# Altium PCB keyboardModule.PcbDoc
Units mil, origin at the board's own origin, x right, y up, seen from the top; angles counter-clockwise.
Board outline 800 x 4750 mil, 2 copper layers (Top Layer, Bottom Layer); 49 components, 46 nets, 169 pads, 26 vias.
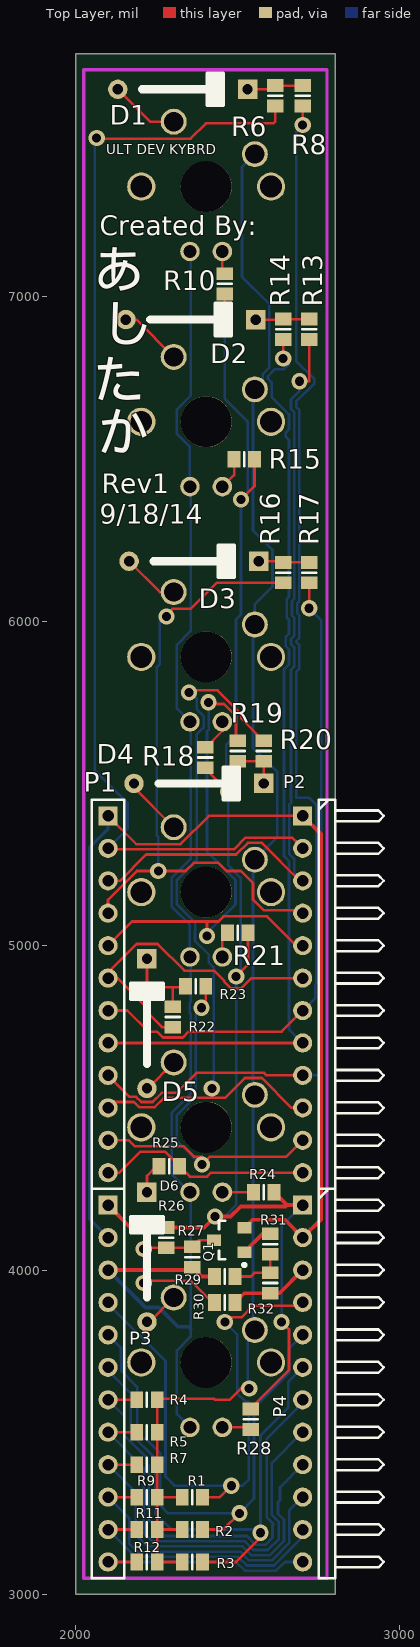
[diagram p0: Top Layer view]
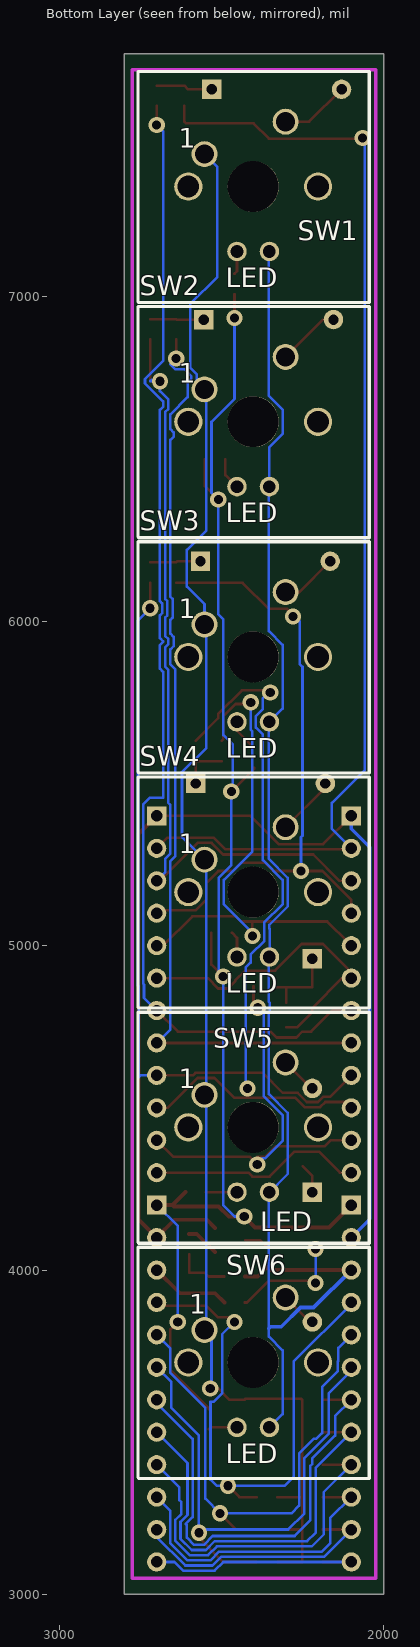
[diagram p1: Bottom Layer view, seen from below]

## Layer stack, top to bottom
Top Layer: signal copper 1.4
Dielectric: dielectric 12.6, FR-4, Dk 4.8
Bottom Layer: signal copper 1.4

## Board outline
2000,3000 2800,3000 2800,7750 2000,7750

## Design rules (kind name [scope] priority, off if disabled: settings)
Clearance [All] p1: gap=8
PolygonConnect [All] p1: connectstyle=Relief reliefconductorwidth=10 reliefentries=4 polygonreliefangle="90 Angle"
RoomDefinition VerticalKeyStrip [InComponentClass('VerticalKeyStrip')] p1: selectionmemoryflags=160 confinementstyle=ConfineIn formatcopy=TRUE lockcomponents=FALSE outline 2800,3000 2000,3000 2000,7750 2800,7750
RoutingVias [All] p1: holewidth=25 width=40 viastyle="Through Hole" minholewidth=28 minwidth=50 maxholewidth=28 maxwidth=50
SilkscreenOverComponentPads [All] p1: minsilkscreentomaskgap=10
SolderMaskExpansion [All] p1: expansion=4
Width [All] p1: maxlimit=25 minlimit=8 preferedwidth=8
27 further rules are at their usual default settings.

## Components (designator, comment, footprint, x,y, rotation, side; value= is the part's Value field where it differs from the comment)
D1 "1N4148" DIODE400/60/32 2530,7640 r180 top
D2 "1N4148" DIODE400/60/32 2555,6930 r180 top
D3 "1N4148" DIODE400/60/32 2565,6185 r180 top
D4 "1N4148" DIODE400/60/32 2580,5500 r180 top
D5 "1N4148" DIODE400/60/32 2220,4960 r270 top
D6 "1N4148" DIODE400/60/32 2220,4240 r270 top
P1 "Header 12H" HDR1X12 2100,5400 r270 top
P2 "Header 12H" HDR1X12H_Right 2700,5400 r270 top
P3 "Header 12H" HDR1X12 2100,4200 r270 top
P4 "Header 12H" HDR1X12H_Right 2700,4200 r270 top
Q1 "NPN_TRANSISTOR" SOT23-3 2520,4055 r180 top
R1 "Res Semi" RESC2012L 2360,3300 r180 top
R2 "Res Semi" RESC2012L 2360,3200 r180 top
R3 "Res Semi" RESC2012L 2360,3100 r180 top
R4 "Res Semi" RESC2012L 2220,3600 r0 top
R5 "Res Semi" RESC2012L 2220,3500 r0 top
R6 "Res Semi" RESC2012L 2615,7620 r270 top
R7 "Res Semi" RESC2012L 2220,3400 r0 top
R8 "Res Semi" RESC2012L 2700,7620 r270 top
R9 "Res Semi" RESC2012L 2220,3300 r0 top
R10 "Res Semi" RESC2012L 2460,7040 r90 top
R11 "Res Semi" RESC2012L 2220,3200 r0 top
R12 "Res Semi" RESC2012L 2220,3100 r0 top
R13 "Res Semi" RESC2012L 2720,6900 r270 top
R14 "Res Semi" RESC2012L 2640,6900 r270 top
R15 "Res Semi" RESC2012L 2520,6500 r180 top
R16 "Res Semi" RESC2012L 2640,6150 r270 top
R17 "Res Semi" RESC2012L 2720,6150 r270 top
R18 "Res Semi" RESC2012L 2400,5580 r90 top
R19 "Res Semi" RESC2012L 2500,5600 r90 top
R20 "Res Semi" RESC2012L 2580,5600 r90 top
R21 "Res Semi" RESC2012L 2500,5040 r180 top
R22 "Res Semi" RESC2012L 2300,4780 r270 top
R23 "Res Semi" RESC2012L 2370,4875 r0 top
R24 "Res Semi" RESC2012L 2580,4240 r180 top
R25 "Res Semi" RESC2012L 2288.5,4320 r0 top
R26 "Res Semi" RESC2012L 2280,4100 r90 top
R27 "Res Semi" RESC2012L 2360,4040 r270 top
R28 "Res Semi" RESC2012L 2540,3540 r270 top
R29 "Res Semi" RESC2012L 2460,3980 r0 top
R30 "Res Semi" RESC2012L 2460,3900 r0 top
R31 "Res Semi" RESC2012L 2600,4080 r90 top
R32 "Res Semi" RESC2012L 2600,3960 r90 top
SW1 "CherrySwitch" CherryMxSwitch 2552.5,7440 r180 bottom
SW2 "CherrySwitch" CherryMxSwitch 2552.5,6715 r180 bottom
SW3 "CherrySwitch" CherryMxSwitch 2552.5,5990 r180 bottom
SW4 "CherrySwitch" CherryMxSwitch 2552.5,5265 r180 bottom
SW5 "CherrySwitch" CherryMxSwitch 2552.5,4540 r180 bottom
SW6 "CherrySwitch" CherryMxSwitch 2552.5,3815 r180 bottom

## Footprints (in the part's own frame and the unit in brackets; to place one, negate y for a bottom-side part, rotate by r counter-clockwise, add the part's x,y. Pads: shape width x height; smd on the part's side, far side on the other; paste and mask are expansions set on the pad)
CherryMxSwitch [mil] "Cherry Mx Switch with holes for LED"
  round 80 hole 59: 1(0,0) 2(250,100)
  round 60 hole 39: 3(100,-300) 4(200,-300)
  round 87 hole 67: 5(-50,-100) 7(350,-100)
  round 157 hole 157 unplated: 6(150,-100)
  silkscreen extent -205,-458 508,255
DIODE400/60/32 [mil]
  rect 60x60 hole 32: 1(0,0)
  round 60 hole 32: 2(400,0)
  silkscreen extent 75,-50 325,50
HDR1X12 [mm] "Connector; Header; 12 Position"
  rect 1.5x1.5 hole 0.9: 1(0,0)
  round 1.5 hole 0.9: 2(2.54,0) 3(5.08,0) 4(7.62,0) 5(10.16,0) 6(12.7,0) 7(15.24,0) 8(17.78,0) 9(20.32,0) 10(22.86,0) 11(25.4,0) 12(27.94,0)
  silkscreen extent -1.27,-1.27 29.21,1.27
HDR1X12H_Right [mm] "Connector; Header; 12 Position; Right Angle"
  rect 1.5x1.5 hole 0.9: 1(0,0)
  round 1.5 hole 0.9: 2(2.54,0) 3(5.08,0) 4(7.62,0) 5(10.16,0) 6(12.7,0) 7(15.24,0) 8(17.78,0) 9(20.32,0) 10(22.86,0) 11(25.4,0) 12(27.94,0)
  silkscreen extent -1.27,1.27 29.21,6.35
RESC2012L [mm] "Chip Resistor, Body 2.0x1.3mm, IPC High Density"
  rect 1x1.3 smd: 1(-0.8,0) 2(0.8,0)
  silkscreen extent 0,-0.55 0,0.55, body extent -1.07,-0.7 1.07,0.7, height 2.54
SOT23-3 [mm] "SOT23, 3-Leads, Body 3.0x2.8mm (max), Pitch 0.95mm, IPC Medium Density"
  rect 1.1x0.9 smd: 1(0,0) 2(0,-1.9) 3(2.36,-0.95)
  silkscreen extent -0.13,-2.45 1.98,1.12, body extent 0.38,-2.47 1.98,0.57, height 1.4

## Part data
D1 D2 D3 D4 D5 D6: library part 5283, "Diode, 1N4148, 75V, 0.4 in., DO-35, 150mA, Switching, 500mW, Any"
P1 P2 P3 P4: "Header, 12-Pin, Right Angle"
Q1: library part 265442, "Transistor, MMBT4401, 40V, SOT23-3, 500mA, NPN, Transistor, On Semi: MMBT4401LT1"
R1 R2 R3 R4 R5 R6 R7 R8 R9 R10 R11 R12 R13 R14 R15 R16 R17 R18 R19 R20 R21 R22 R23 R24 R25 R26 R27 R28 R29 R30 R31 R32: "Semiconductor Resistor"
SW1 SW2 SW3 SW4 SW5 SW6: "Cherry MX Switch layout"

## Via types
v1: diameter 50, hole 28, Top Layer to Bottom Layer, 26 vias

## Nets (pads, with @x,y where several pads share a name; then routed paths per layer and width w, separated by ;. In a path a pad name is that pad's centre, name@x,y a point inside that pad or via, vN(x,y) a via of type N, cw(c..) or ccw(c..) an arc to the next point about the centre after c; other vN are vias at no path point)
+5: P3.1 P4.1 R10.1 R15.1 R18.1 R21.1 R24.1 R26.2 R28.1 | length 4773.7
  Top Layer w8: R18.1 2400,5545 v1(2470,5475) ; v1(2460,6935) R10.1 ; v1(2495,4905) 2531.5,4941.5 R21.1 ; v1(2510,6375) 2551.5,6416.5 R15.1 ; R28.1 2540,3574.01 2658,3692.01 2658,3817 v1(2635,3840)
  Top Layer w12: P3.1 2168.5,4131.5 R26.2 2396.5,4131.5 v1(2430,4165) 2478,4165 2509,4196 2647.5,4196 2651.5,4200 ; R24.1 2651.5,4200 ; P4.1 2651.5,4200
  Bottom Layer w8: v1(2430,4165) 2460,4165 2495,4200 v1(2495,4905) 2509,4919 2509,5209.11 2470,5248.11 v1(2470,5475) ; v1(2460,6935) 2460,6685.49 2531,6614.49 2531,6396 v1(2510,6375) 2510,6021.04 2494.5,6005.54 2494.5,5649.5 2465,5620 v1@2465,5490 ; v1(2635,3840) 2635,4135 P4.1
BACKLIGHTPWM: P4.3 R30.2 R32.1 | length 249.9
  Top Layer w12: R30.2 2520,3928.5 R32.1 2628.5,3928.5 P4.3
GND: P1.1 P2.1 P3.2 P4.2 Q1.2 | length 3578.9
  Top Layer w8: P1.1 2187,5313 2324.04,5313 2411.04,5400 P2.1
  Top Layer w12: Q1.2 2545.2,4155 2645,4155 P4.2 2756,4156 2756,5344 P2.1
  Bottom Layer w10: P3.2 2043,4157 2043,5303.14 2100,5360.14 P1.1
KEYINPUT0: P1.2 P2.2 R6.2 | length 3509.5
  Top Layer w8: v1@2065,7488 2354.5,7488 2401.5,7535 2610,7535 2615,7540 R6.2 ; P1.2 2103,5297 2488.33,5297 2524.33,5333 2667,5333 P2.2
  Bottom Layer w8: v1(2065,7490) 2058.47,7483.47 2058.47,5541.53 2160,5440 2160,5360 P1.2
KEYINPUT1: P1.3 P2.3 R13.2 | length 2485.5
  Top Layer w8: P1.3 2136.38,5200 2217.38,5281 2494.96,5281 2530.96,5317 2574.04,5317 2691.04,5200 P2.3 ; v1(2690,6740) 2720,6740 R13.2
  Bottom Layer w8: P2.3 2674,5226 2674,5267.27 2658.47,5282.8 2658.47,5434.5 2664.49,5440.51 2664.49,5448.91 2664,5449.4 2664,5850.38 2674,5860.38 2674,5919.62 2664,5929.62 2664,5945 2674,5955 2674,6011.05 2667,6018.05 2667,6061.95 2674,6068.95 2674,6644.62 2664,6654.62 2664,6684 2690,6710 v1(2690,6740) 2720,6740 2715,6745
KEYINPUT2: P1.4 P2.4 R16.2 | length 1990.5
  Top Layer w8: P1.4 2100,5140.99 2189.01,5230 v1(2255,5230) 2339.51,5230 2365.01,5255.5 2439.99,5255.5 2465.49,5230 2510,5230 2547,5193 2547,5142.01 2579.51,5109.5 2690.5,5109.5 P2.4 ; v1(2280,6015) 2280,6020 2298,6038 2354.5,6038 2435,6118.5 R16.2
  Bottom Layer w8: v1(2255,5230) 2255,5334.46 2250.5,5338.96 2250.5,5859.51 2259.48,5868.49 2259.48,5999.48 2275,6015 v1@2275,6020
KEYINPUT3: P1.5 P2.5 R19.2 | length 1704.8
  Top Layer w8: P1.5@2109,5009 2174.5,5074.5 2405,5074.5 ; v1(2405,5030) 2405,5074.5 ; v1(2410,5750) 2405,5745 2456.9,5745 2494.5,5707.4 2494.5,5637 R19.2 ; P2.5 2680,5000 2590,5090 2455.49,5090 2439.99,5074.5 2405,5074.5
  Top Layer w12: P1.5 P1.5@2109,5009
  Bottom Layer w8: v1(2405,5030) 2405,5039.51 2493,5127.51 2493,5202.49 2405,5290.49 2405,5660.48 2410.5,5665.98 2410.5,5749.5 v1(2410,5750)
KEYINPUT4: P1.6 P2.6 R22.2 | length 995.5
  Top Layer w8: R22.2 2266.5,4748.5 2220,4795 2220,4808.5 2128.5,4900 P1.6 2100,4916.97 2188.03,5005 2253.1,5005 2335.1,4923 2427,4923 2458,4892 2458,4889.67 2479.67,4868 2510.33,4868 2542.33,4900 P2.6
KEYINPUT5: P1.7 P2.7 R8.2 | length 3600.6
  Top Layer w8: P1.7 2159.23,4800 2224.23,4735 2251.26,4735 2269.44,4716.82 2330.56,4716.82 2348.74,4735 2635,4735 P2.7 ; v1(2700,7530) R8.2
  Bottom Layer w8: P2.7 2739,4839 2739,4880.27 2741.53,4882.8 2741.53,5434.5 2720,5456.03 2680,5456.03 2680,5843.76 2690,5853.76 2690,5926.24 2680,5936.24 2680,5938.37 2690,5948.37 2690,6017.67 2683,6024.67 2683,6055.33 2690,6062.33 2690,6651.24 2680,6661.24 2680,6677.37 2736,6733.37 2736,6746.63 2680,6802.63 2680,7510 v1(2700,7530)
KEYINPUT6: P1.8 P2.8 R14.2 | length 2899
  Top Layer w8: P1.8 P2.8 ; v1(2640,6810) R14.2
  Bottom Layer w8: v1(2640,6810) 2658,6792 2643,6777 2614.67,6777 2593,6755.33 2593,6748.04 2604.5,6736.54 2604.5,6691.49 2658,6637.99 2658,6592.01 2648,6582.01 2648,6568.76 2658,6558.76 2658,6075.58 2651,6068.58 2651,6011.42 2658,6004.42 2658,5961.63 2648,5951.63 2648,5922.99 2658,5912.99 2658,5867.01 2642.47,5851.48 2642.47,5276.17 2658,5260.64 2658,4742 P2.8
KEYINPUT7: P1.9 P2.9 R17.2 | length 2271.7
  Top Layer w8: P1.9 2166,4534 2186.6,4534 2202.6,4518 2237.4,4518 2265.9,4546.5 2311.5,4546.5 2373,4608 2580.67,4608 2588.67,4600 P2.9 ; v1(2720,6040) R17.2
  Bottom Layer w8: P2.9 2750,4600 2755,4595 2755,4873.64 2757.53,4876.17 2757.53,6002.47 v1(2720,6040)
KEYINPUT8: P1.10 P2.10 R20.2 | length 2314.2
  Top Layer w8: P1.10 2118,4518 2179.98,4518 2195.98,4502 2244.02,4502 2272.52,4530.5 2420,4530.5 ; v1(2350,5780) 2357,5787 2437.52,5787 2510.5,5714.02 2510.5,5701 R20.2 ; v1(2420,4560) 2420,4530.5 ; P2.10 2666.04,4500 2574.04,4592 2522,4592 2460.5,4530.5 2420,4530.5
  Bottom Layer w8: 2368,5045.33 2368,5014.67 2410.5,4972.17 2410.5,4947.6 2425.5,4932.6 v1@2425.5,4565.5 ; 2368.5,5045.83 2368.5,5071.01 2312,5127.51 2312,5202.49 2373,5263.49 2373,5651.1 2394.5,5672.6 2394.5,5707.4 2373,5728.9 2373,5762.65 2370.65,5765
KEYINPUT9: P1.11 P2.11 R23.2 | length 1225
  Top Layer w8: P1.11 2164.01,4400 2183.01,4381 2333.51,4381 2365.01,4349.5 v1@2390,4349.5 ; v1(2388.5,4808.5) 2401.5,4821.5 R23.2 ; v1(2390,4325) 2414.5,4349.5 ; 2415,4349.5 2649.5,4349.5 P2.11
  Bottom Layer w8: 2370.5,4790.5 2370.5,4535.99 2312,4477.49 2312,4398 2365,4345 2375,4345
KEYINPUT10: P1.12 P2.12 R25.2 | length 663.8
  Top Layer w8: P1.12 2135,4300 2200,4365 2275,4365 2352,4288 2405.33,4288 2417.33,4300 P2.12
KEYOUTPUT0: P3.4 P4.4 R1.1 | length 1777.3
  Top Layer w8: R1.1 2445,3300 v1(2480,3335) ; v1(2460,3840) 2465,3840 2480,3855 2512.32,3855 2547.32,3890 2690,3890 P4.4
  Bottom Layer w8: P3.4 2100,3895.99 2277,3718.99 2277,3363 2305,3335 v1(2480,3335) 2515,3335 2534,3354 2534,3594 2523.67,3594 2498,3619.67 2498,3802 v1(2460,3840)
KEYOUTPUT1: P3.5 P4.5 R2.1 | length 1615.9
  Top Layer w8: R2.1 2455,3200 v1(2505,3250)
  Bottom Layer w8: P3.5 2140,3760 2140,3720.26 2141.53,3718.73 2141.53,3688.47 2190,3640 2190,3497.63 2207.63,3480 2215,3480 2261,3434 2261,3274 2285,3250 v1(2505,3250) 2550,3295 2550,3575.05 2658,3683.05 2658,3758 P4.5
KEYOUTPUT2: P3.6 P4.6 R3.1 | length 1643.9
  Top Layer w8: R3.1 2495,3100 v1@2577.5,3182.5
  Bottom Layer w8: P3.6 2100,3690 2170,3620 2170,3495 2245,3420 2245,3250 2295,3200 2560,3200 v1(2570,3190) 2570,3490 2655,3575 2655,3655 P4.6
KEYOUTPUT3: P3.7 P4.7 R4.1 | length 1414.8
  Top Layer w8: P3.7 R4.1
  Bottom Layer w8: P3.7 2150,3550 2150,3490 2220,3420 2220,3402.63 2226,3396.63 2226,3229 2275,3180 2527.67,3180 2554.67,3153 2585.33,3153 2607,3174.67 2607,3213.38 2610.47,3216.85 2589,3238.33 2589,3479 2700,3590 P4.7
KEYOUTPUT4: P3.8 P4.8 R5.1 | length 1273.5
  Top Layer w8: P3.8 R5.1
  Bottom Layer w8: P3.8 2210,3390 2210,3190 2236,3164 2521.05,3164 2548.05,3137 2591.95,3137 2626.47,3171.52 2626.47,3223.48 2605,3244.95 2605,3405 P4.8
KEYOUTPUT5: P3.9 P4.9 R7.1 | length 1115.1
  Top Layer w8: P3.9 R7.1
  Bottom Layer w8: P3.9 2185,3315 2185,3185 2222,3148 2514.42,3148 2541.42,3121 2598.58,3121 2642.47,3164.89 2642.47,3230.11 2624,3248.58 2624,3284.26 2630,3290.26 2630,3330 P4.9
KEYOUTPUT6: P3.10 P4.10 R9.1 | length 954.1
  Top Layer w8: P3.10 R9.1
  Bottom Layer w8: P3.10 2165,3235 2165,3157.63 2190.63,3132 2507.79,3132 2534.79,3105 2605.21,3105 2658.47,3158.26 2658.47,3258.47 P4.10
KEYOUTPUT7: P3.11 P4.11 R11.1 | length 793.8
  Top Layer w8: P3.11 R11.1
  Bottom Layer w8: P3.11 2184,3116 2501.16,3116 2528.16,3089 2611.84,3089 2700,3177.16 P4.11
KEYOUTPUT8: P3.12 P4.12 R12.1 | length 710.9
  Top Layer w8: P3.12 R12.1
  Bottom Layer w8: P3.12 2494.54,3100 2521.54,3073 2618.46,3073 2645.46,3100 P4.12
LED_GND: P3.3 R27.2 R29.1 SW1.4 SW2.4 SW3.4 SW4.4 SW5.4 SW6.4 | length 4503.8
  Top Layer w12: P3.3 2351.5,4000 R27.2 2388.5,3980 R29.1
  Bottom Layer w8: SW6.4 2312,3555.5 2312,3752.49 2354.5,3794.99 2354.5,3820 2354.5,4238 2296,4296.5 2296,4484.11 2354.5,4542.61 2354.5,4790.18 2351.5,4793.18 2351.5,4823.83 2354.5,4826.83 2354.5,4963 SW4.4 2352,4965.5 2352,5051.95 2352.5,5052.45 2352.5,5064.39 2296,5120.89 2296,5209.11 2354.5,5267.61 2354.5,5688 2312,5730.5 2312,5927.49 2354.5,5969.99 2354.5,6413 SW2.4 2352.5,6537.01 2312,6577.51 2312,6652.49 2355,6695.49 2355,7137.5 SW1.4
  Bottom Layer w12: P3.3 2216,3884 2257.13,3884 2316.13,3825 2349.5,3825 2354.5,3820
NetD1_1: D1.1 R6.1 R8.1 | length 174.8
  Top Layer w8: D1.1 2603.5,7640 R6.1 R8.1
NetD1_2: D1.2 SW1.2 | length 213.9
  Top Layer w8: D1.2 2230,7540 SW1.2
NetD2_1: D2.1 R13.1 R14.1 | length 165.6
  Top Layer w8: D2.1 2638.5,6930 R14.1 R13.1
NetD2_2: D2.2 SW2.2 | length 195.1
  Top Layer w8: D2.2 2187.5,6930 SW2.2
NetD3_1: D3.1 R16.1 R17.1 | length 156.5
  Top Layer w8: D3.1 2636.5,6185 R16.1 R17.1
NetD3_2: D3.2 SW3.2 | length 176.9
  Top Layer w8: D3.2 2260,6090 SW3.2
NetD4_1: D4.1 R19.1 R20.1 | length 148.5
  Top Layer w8: R19.1 R20.1 D4.1
NetD4_2: D4.2 SW4.2 | length 185.7
  Top Layer w8: D4.2 2180,5487.5 SW4.2
NetD5_1: D5.1 R22.1 R23.1 | length 255.5
  Top Layer w8: D5.1 2220,4871.5 2300,4871.5 ; R22.1@2300,4824.5 2300,4871.5 ; R23.1 2335,4871.5 2300,4871.5
NetD5_2: D5.2 SW5.2 | length 115.6
  Top Layer w8: D5.2 2222.5,4560 SW5.2
NetD6_1: D6.1 R25.1 | length 92.4
  Top Layer w8: D6.1 2220,4290 R25.1@2250,4320
NetD6_2: D6.2 SW6.2 | length 113.6
  Top Layer w8: D6.2 2227.5,3840 SW6.2
NetQ1_1: Q1.1 R31.2 | length 103.4
  Top Layer w12: Q1.1 2576.5,4111.5 R31.2
NetQ1_3: Q1.3 R26.1 R27.1 R30.1 | length 577.6
  Top Layer w8: v1(2210,3960) 2217,3967 2354.5,3967 2421.5,3900 R30.1 ; v1@2213.5,4068.5 R26.1 2357.01,4068.5 2380.91,4092.4 Q1.3
  Bottom Layer w8: v1(2210,3960) v1(2210,4065)
NetR1_2: R1.2 R2.2 R3.2 R4.2 R5.2 R7.2 R9.2 R11.2 R12.2 SW1.1 SW2.1 SW3.1 SW4.1 SW5.1 SW6.1 | length 5037.8
  Top Layer w8: R3.2 R12.2 R11.2 ; R2.2 R11.2 ; R1.2 R9.2 ; v1(2535,3635) 2510,3635 2475,3600 2430,3600 2426.82,3603.18 2254.68,3603.18 R4.2 R5.2 R7.2 R9.2 ; R11.2 R9.2
  Bottom Layer w8: v1(2535,3635) 2531,3639 2531,3793.5 SW6.1 2547,3820.5 2547,4534.5 SW5.1 2547,4545.5 2547,5259.5 2622,5334.5 2622,5534.97 2547,5609.97 2547,5984.5 SW3.1 2552.5,6052.5 2607,6107 2607,6219.97 2547,6279.97 2547,6709.5 SW2.1 2577,6739.5 2577,6761.95 2597,6781.95 2597,6978 2513,7062 2513,7400.5 SW1.1
NetR10_2: R10.2 SW1.3 | length 71.6
  Top Layer w8: SW1.3 2452.5,7079 R10.2
NetR15_2: R15.2 SW2.3 | length 99.9
  Top Layer w8: SW2.3 2488.5,6451 R15.2
NetR18_2: R18.2 SW3.3 | length 101.7
  Top Layer w8: R18.2@2400,5610 2452.5,5662.5 SW3.3
NetR21_2: R21.2 SW4.3 | length 81.6
  Top Layer w8: SW4.3 2452.5,5024 R21.2
NetR24_2: R24.2 SW5.3 | length 96
  Top Layer w8: SW5.3 R24.2
NetR28_2: R28.2 SW6.3 | length 90.2
  Top Layer w8: SW6.3 2533.5,3515 R28.2
NetR29_2: R29.2 R31.1 R32.2 | length 170.3
  Top Layer w8: R29.2 2540,3980 2551.5,3991.5 R32.2 R31.1
pads on no net: SW1.5 SW1.6 SW1.7 SW2.5 SW2.6 SW2.7 SW3.5 SW3.6 SW3.7 SW4.5 SW4.6 SW4.7 SW5.5 SW5.6 SW5.7 SW6.5 SW6.6 SW6.7

## Keep-outs
Keep-Out Layer:
  lines w10: 2025,3050 2775,3050 2775,7700 2025,7700 2025,3050

## Silkscreen, mask and mechanical layers (free items; w line width, h text height)
Top Overlay:
  text "ULT DEV KYBRD" at 2095,7440 h30
  text "Created By:" at 2075,7190 h60
  text "あ" at 2055,6990 h200
  text "し" at 2075,6820 h200
  text "た" at 2055,6650 h200
  text "か" at 2065,6490 h200
  text "Rev1" at 2080,6395 h60
  text "9/18/14" at 2075,6300 h60
Drill Drawing:
  text ".LEGEND" at 2950,3200 h60
  text "Drill Drawing." at 2950,3100 h60

## Dimensions
2025,3050 to 2775,3050 on Mechanical 1
2025,3050 to 2025,7700 on Mechanical 1

## Text inside footprints (layer, text, board x,y; h text height)
SW1: Bottom Overlay "1" at 2632.5,7460 h60; Bottom Overlay "LED" at 2487.5,7030 h60
SW2: Bottom Overlay "1" at 2632.5,6735 h60; Bottom Overlay "LED" at 2487.5,6305 h60
SW3: Bottom Overlay "1" at 2632.5,6010 h60; Bottom Overlay "LED" at 2487.5,5580 h60
SW4: Bottom Overlay "1" at 2632.5,5285 h60; Bottom Overlay "LED" at 2487.5,4855 h60
SW5: Bottom Overlay "1" at 2632.5,4560 h60; Bottom Overlay "LED" at 2380,4120 h60
SW6: Bottom Overlay "1" at 2600,3865 h60; Bottom Overlay "LED" at 2487.5,3405 h60